# EAGLE board OpenBook Schematic v49 (EAGLE 9.7.0)
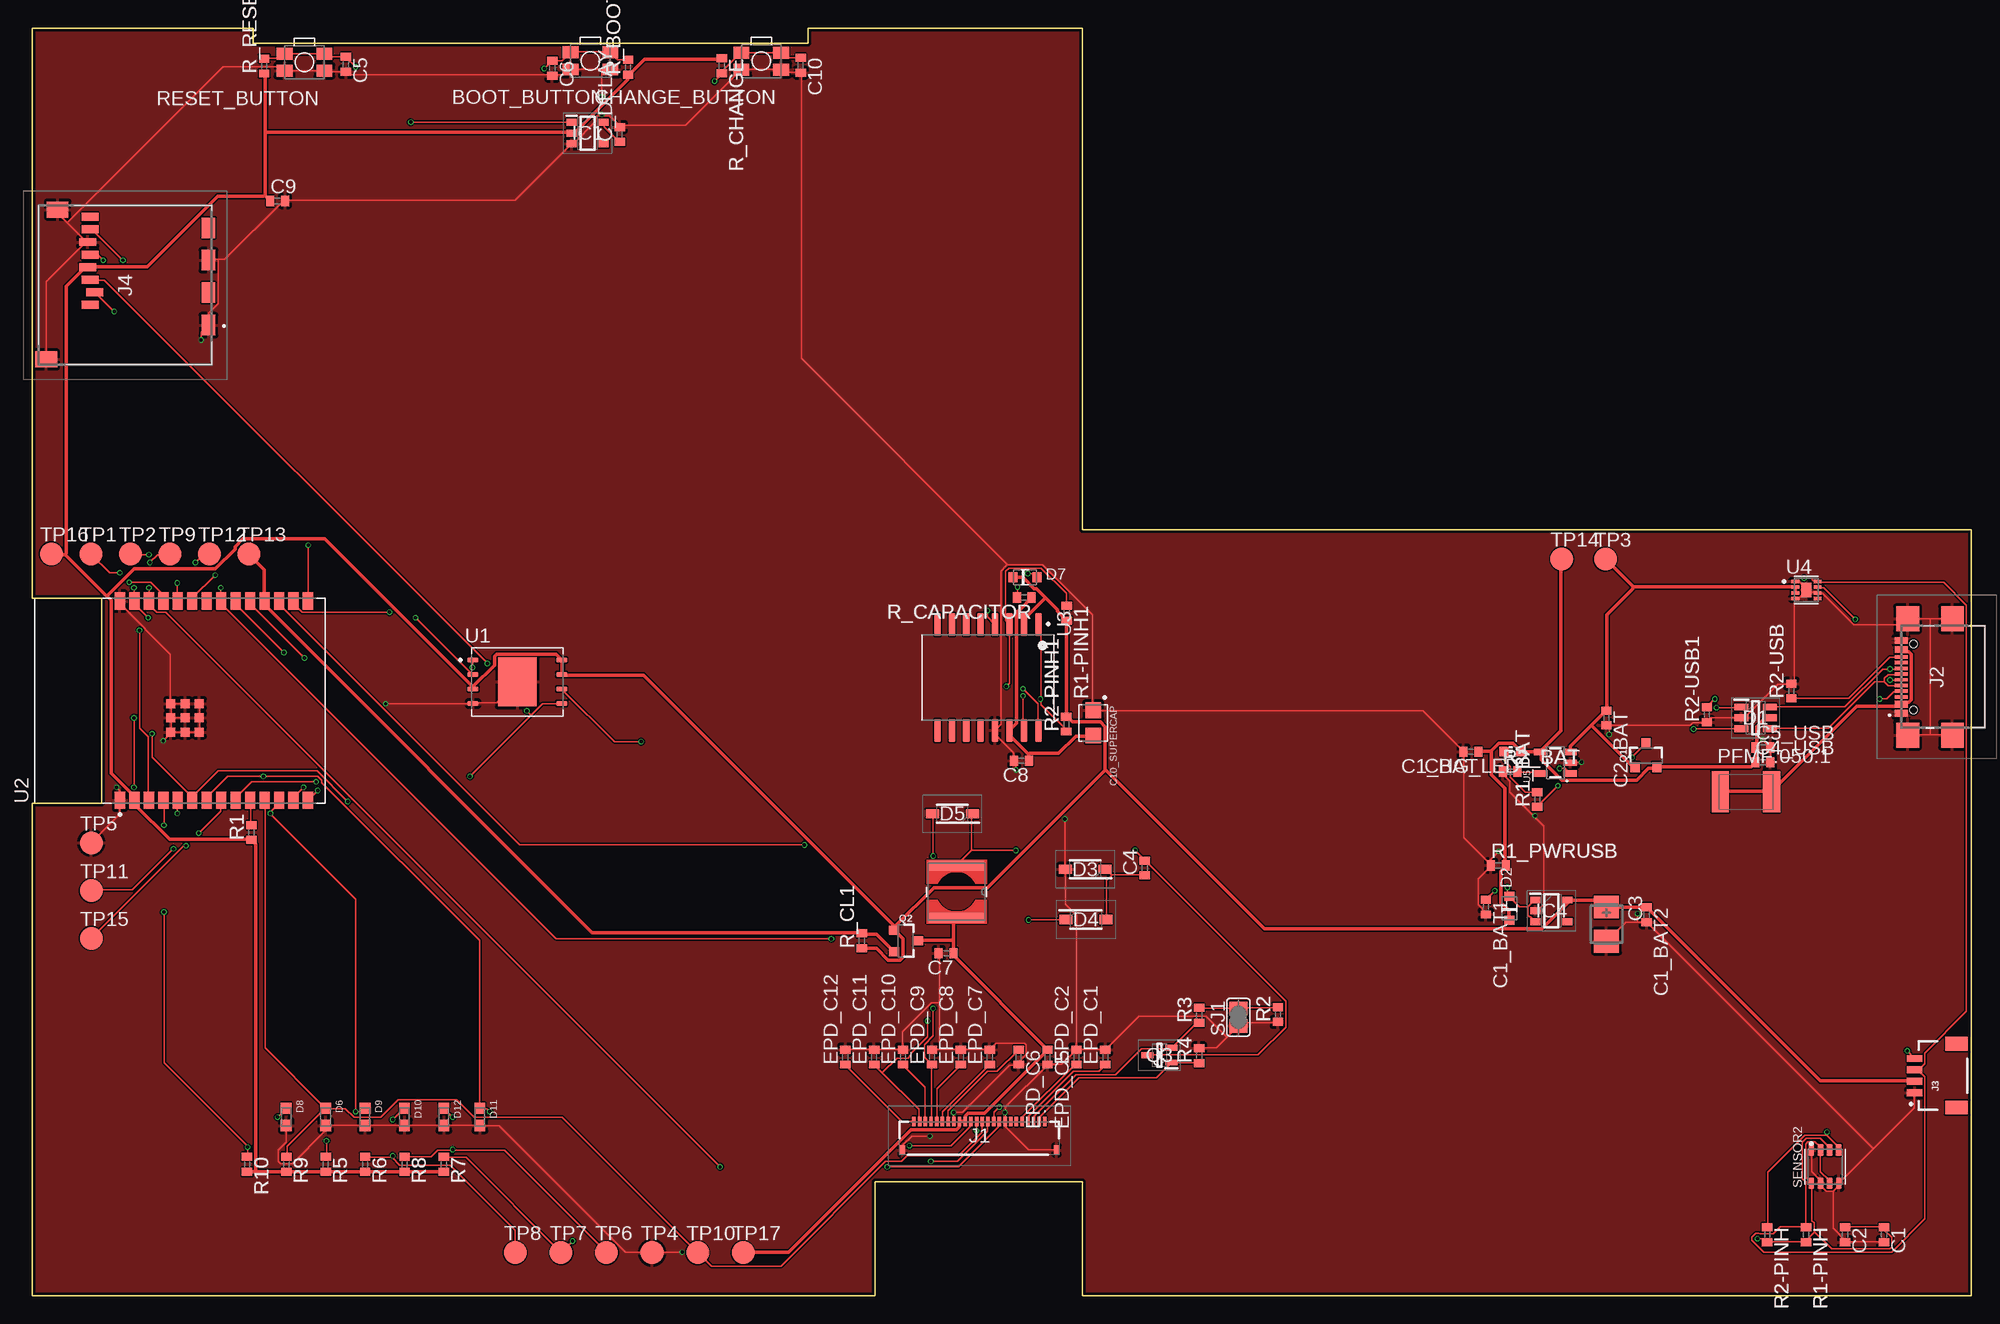
[diagram p0: board, top side]
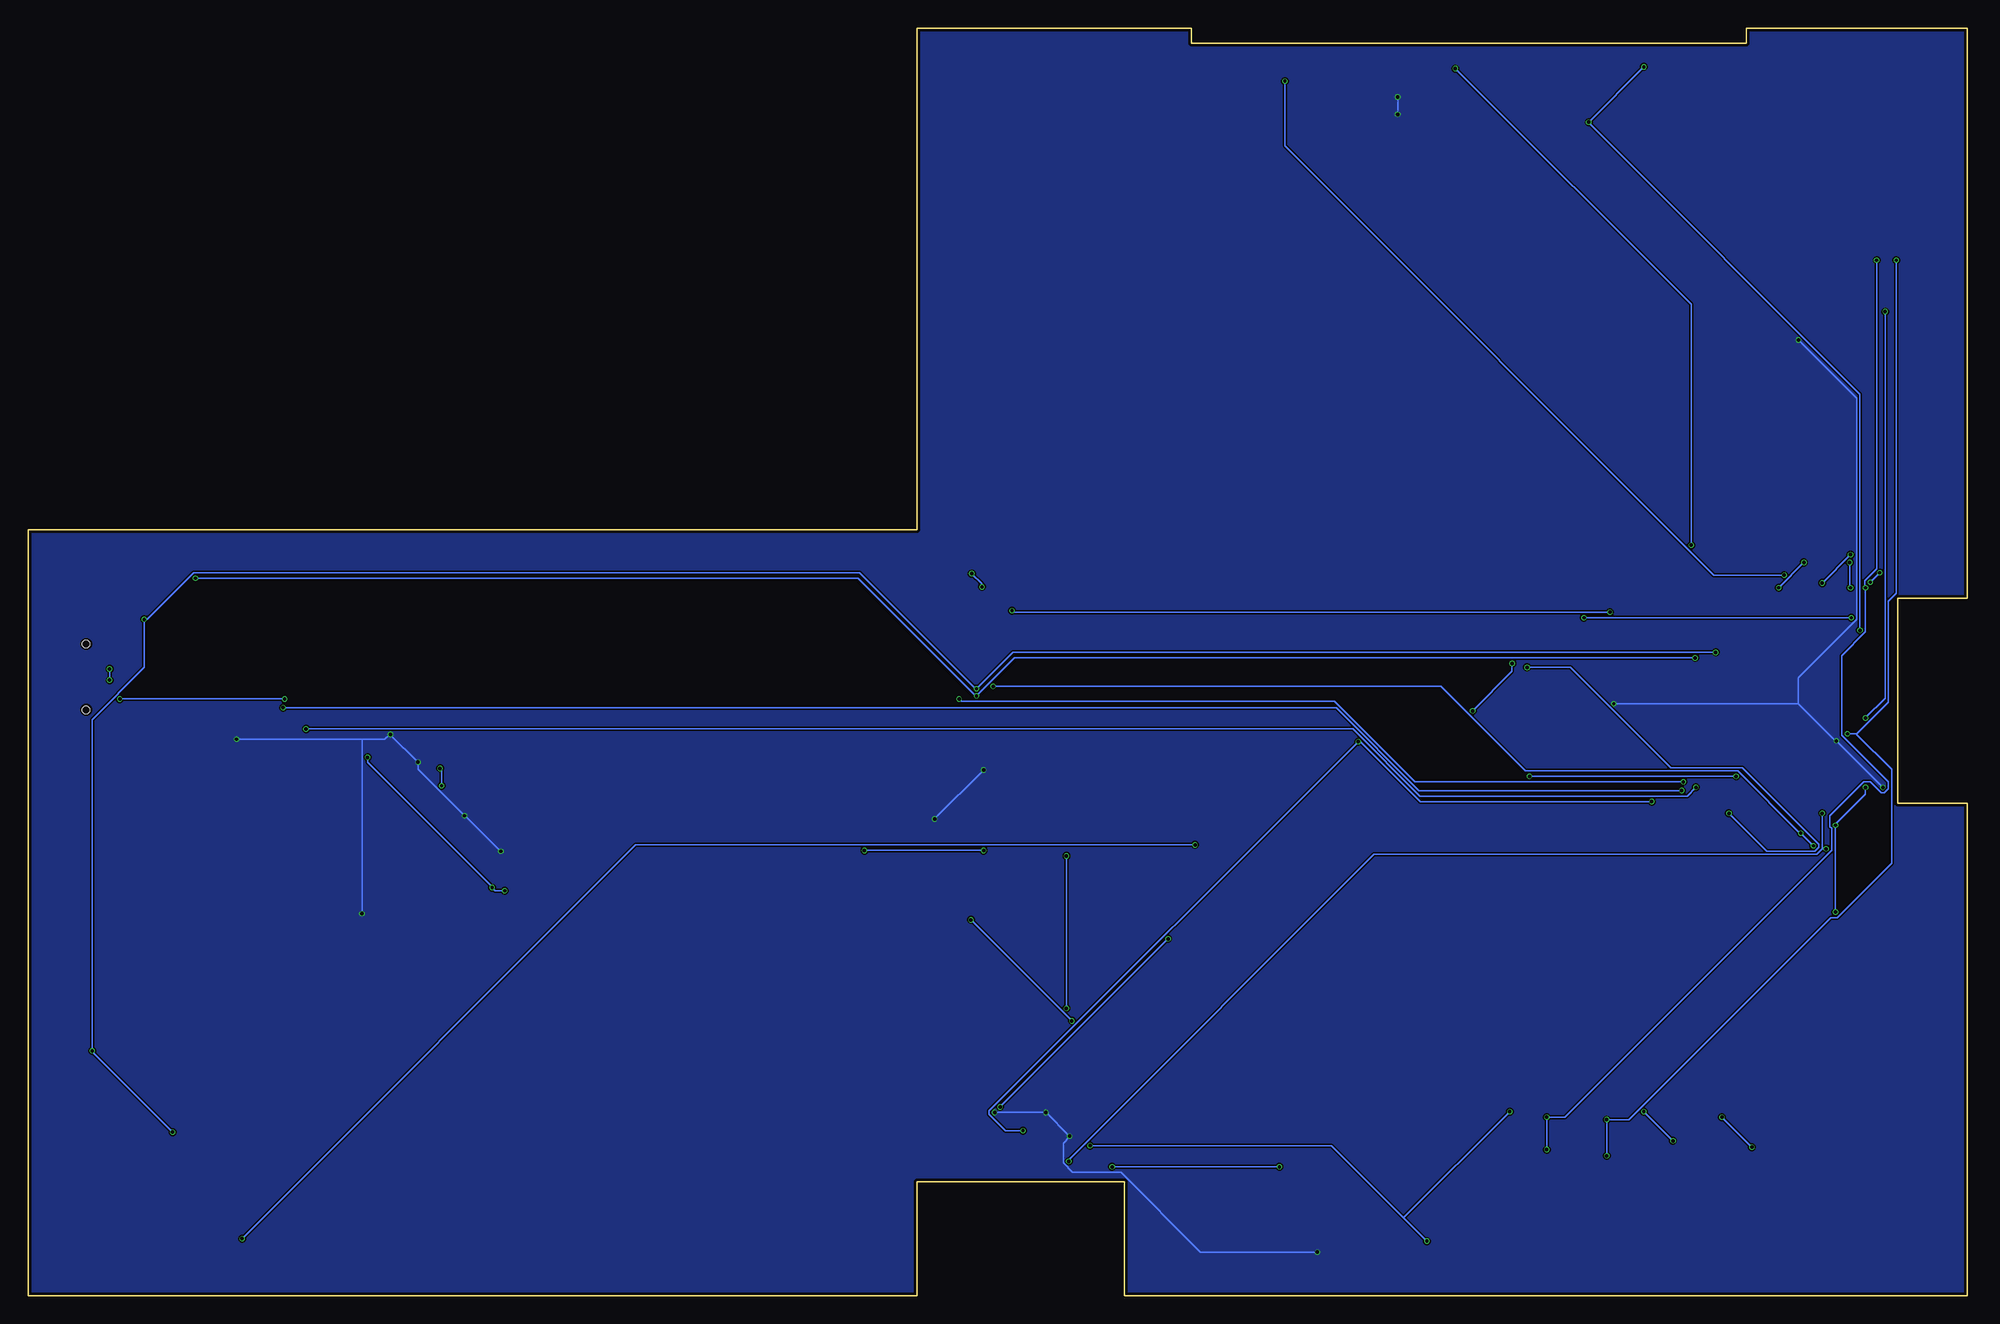
[diagram p1: board, bottom side, seen from below]

Size 170.2 x 111.2 mm. Coordinates in mm from the lower left corner, seen from the top.
Outline: 0,0 74,0 74,10 92.2,10 92.2,0 170.2,0 170.2,67.2 92.2,67.2 92.2,111.2 68.1,111.2 68.1,109.9 19.4,109.9 19.4,111.2 0,111.2 0,61.2 6.1,61.2 6.1,43.2 0,43.2 0,0
Copper layers (1*16): Top 0.035mm / dielectric 1.6mm / Bottom 0.035mm
Design rules "jlcpcb-2layers.dru": minimum track width 0.15mm, minimum drill 0.3mm, track to track 5mil, track to pad 5mil, pad to pad 5mil, via to via 5mil, smd to smd 5mil, copper to edge 0.2mm, drill to drill 6mil, minimum pad ring 10mil, minimum via ring 3mil, stop-mask expansion 4mil, vias tented up to drill 0mil, thermal gap 10mil
Net classes: 1 Power: width 0.3 mm

## Footprints (pad centres in the part's own frame; a part is rotated, then mirrored left to right if it is on the bottom)
MYBUTTON = smd 1.4 x 1.05: 1 1.75,0.75; 2 -1.75,0.75; 3 -1.75,-0.75; 4 1.75,-0.75
EAGLE-LTSPICE_C0402 = smd 0.7 x 0.9: 1 -0.65,0; 2 0.65,0
RCL_CT3528 = smd 2 x 2.2: + -1.5,0; - 1.5,0
CAPCP3225X100N = smd 1.4 x 1.4: 1 -1.1,0; 2 1.1,0
ADAFRUIT_CHIP-LED0603 = smd 0.8 x 0.8: A 0,-0.75; C 0,0.75
SOT95P280X145-6N = smd 1.2 x 0.6: 1 -1.25,0.95; 2 -1.25,0; 3 -1.25,-0.95; 4 1.25,-0.95; 5 1.25,0; 6 1.25,0.95
ESP32_WROVER_AVX---SD0805S020S1R0_AVX_SD0805S020S1R0_0 = smd 0.8 x 0.9: 1 -1.05,0; 2 1.05,0
SOD3716X135N = smd 1.15 x 0.8: 1 -1.75,0; 2 1.75,0
DIOC1608X36N = smd 0.97 x 0.94: 1 -0.75,0; 2 0.75,0
SOT95P280X125-5N = smd 0.9 x 0.6: 1 -1.4,0.95; 2 -1.4,0; 3 -1.4,-0.95; 4 1.4,-0.95; 5 1.4,0.95
SOT95P280X120-5N = smd 0.9 x 0.6: 1 -1.4,0.95; 2 -1.4,0; 3 -1.4,-0.95; 4 1.4,-0.95; 5 1.4,0.95
FH34SRJ24S05SH99 = smd 0.3 x 0.8: 1 5.75,1.45; 2 5.25,1.45; 3 4.75,1.45; 4 4.25,1.45; 5 3.75,1.45; 6 3.25,1.45; 7 2.75,1.45; 8 2.25,1.45; 9 1.75,1.45; 10 1.25,1.45; 11 0.75,1.45; 12 0.25,1.45; 13 -0.25,1.45; 14 -0.75,1.45; 15 -1.25,1.45; 16 -1.75,1.45; 17 -2.25,1.45; 18 -2.75,1.45; 19 -3.25,1.45; 20 -3.75,1.45; 21 -4.25,1.45; 22 -4.75,1.45; 23 -5.25,1.45; 24 -5.75,1.45 | smd 0.4 x 0.8: MP1 6.75,-1.05; MP2 -6.75,-1.05
SAMACSYS_PARTS_USB4110GFA = smd 0.3 x 1.15: A1 -3.35,3.678; A4 -2.55,3.678; A5 -1.25,3.678; A6 -0.25,3.678; A7 0.25,3.678; A8 1.25,3.678; A9 2.55,3.678; A12 3.35,3.678; B1 3.05,3.678; B4 2.25,3.678; B5 1.75,3.678; B6 0.75,3.678; B7 -0.75,3.678; B8 -1.75,3.678; B9 -2.25,3.678; B12 -3.05,3.678 | smd 2.18 x 2: MP1 -5.11,-0.827; MP2 5.11,-0.827; MP3 -5.11,3.103; MP4 5.11,3.103 | hole 0.65: -2.89,2.603; 2.89,2.603
JST04_1MM_RA = smd 0.6 x 1.35: 1 -1.5,0; 2 -0.5,0; 3 0.5,0; 4 1.5,0 | smd 1.2 x 2: NC1 2.8,-3.675; NC2 -2.8,-3.675
112ATAARR03ATTEND = smd 1.8 x 1.2: G1 10.6,10.4; G2 4.9,10.4; S1 7.75,10.4; S2 2.05,10.4 | smd 1.4 x 1.9: G3 13.6,-3.85; G4 0.45,-2.85 | smd 0.7 x 1.5: P1 8.8,0; P2 7.7,0.4; P3 6.6,0; P4 5.5,-0.2; P5 4.4,0; P6 3.3,-0.2; P7 2.2,0; P8 1.1,0
IND_4828-WE-TPC_WRE = smd 0.889 x 4.826: 1 -2.286,0; 2 2.286,0
ESP32C6_VARISTOR_CT/CN1812 = smd 1.5 x 3.6: 1 -2.25,0; 2 2.25,0
ESP32_WROVER_SPARKFUN-DISCRETESEMI_SOT23-3 = smd 0.8 x 0.9: 1 -0.95,-1; 2 0.95,-1; 3 0,1.1
SOT65P210X110-3N = smd 1.05 x 0.5: 1 -1.05,0.65; 2 -1.05,-0.65; 3 1.05,0
ESP32_WROVER_EAGLE-LTSPICE_R0402 = smd 0.7 x 0.9: 1 -0.65,0; 2 0.65,0
ESP32_WROVER_BME680_PSON80P300X300X100-8N = smd 1.016 x 0.5: 1 1.458,1.2; 2 1.458,0.4; 3 1.458,-0.4; 4 1.458,-1.2; 5 -1.458,-1.22; 6 -1.458,-0.4; 7 -1.458,0.4; 8 -1.458,1.2
SJ = smd 1.168 x 1.6: 1 -0.762,0; 2 0.762,0
TP20R = smd 2 x 2: TP 0,0
SON127P600X800X80-9N = smd 0.94 x 0.44: 1 -3.895,1.905; 2 -3.895,0.635; 3 -3.895,-0.635; 4 -3.895,-1.905; 5 3.895,-1.905; 6 3.895,-0.635; 7 3.895,0.635; 8 3.895,1.905 | smd 3.4 x 4.3: 9 0,0
XCVR_ESP32-C6-WROOM-1-N8 = smd 1.5 x 0.9: 1 -8.75,5.26; 2 -8.75,3.99; 3 -8.75,2.72; 4 -8.75,1.45; 5 -8.75,0.18; 6 -8.75,-1.09; 7 -8.75,-2.36; 8 -8.75,-3.63; 9 -8.75,-4.9; 10 -8.75,-6.17; 11 -8.75,-7.44; 12 -8.75,-8.71; 13 -8.75,-9.98; 14 -8.75,-11.25; 15 8.75,-11.25; 16 8.75,-9.98; 17 8.75,-8.71; 18 8.75,-7.44; 19 8.75,-6.17; 20 8.75,-4.9; 21 8.75,-3.63; 22 8.75,-2.36; 23 8.75,-1.09; 24 8.75,0.18; 25 8.75,1.45; 26 8.75,2.72; 27 8.75,3.99; 28 8.75,5.26 | smd 0.8 x 0.8: 29_1 -2.755,0.79; 29_2 -1.505,0.79; 29_3 -0.255,0.79; 29_4 -2.755,-0.46; 29_5 -1.505,-0.46; 29_6 -0.255,-0.46; 29_7 -2.755,-1.71; 29_8 -1.505,-1.71; 29_9 -0.255,-1.71
SOIC127P1032X265-16N = smd 2.05 x 0.59: 1 -4.655,4.445; 2 -4.655,3.175; 3 -4.655,1.905; 4 -4.655,0.635; 5 -4.655,-0.635; 6 -4.655,-1.905; 7 -4.655,-3.175; 8 -4.655,-4.445; 9 4.655,-4.445; 10 4.655,-3.175; 11 4.655,-1.905; 12 4.655,-0.635; 13 4.655,0.635; 14 4.655,1.905; 15 4.655,3.175; 16 4.655,4.445
SON50P200X200X80-9N = smd 0.76 x 0.3: 1 -0.985,0.75; 2 -0.985,0.25; 3 -0.985,-0.25; 4 -0.985,-0.75; 5 0.985,-0.75; 6 0.985,-0.25; 7 0.985,0.25; 8 0.985,0.75 | smd 0.9 x 1.3: 9 0,0
ESP32_WROVER_SPARKFUN-IC-POWER_SOT23-5 = smd 0.55 x 1.2: 1 -0.95,-1.3; 2 0,-1.3; 3 0.95,-1.3; 4 0.95,1.3; 5 -0.95,1.3

## Placement (x,y rotation side)
BOOT_BUTTON  BUTTON_CUSYOMV11  [MYBUTTON]  49,108.35 180 top
C1  100nF  [EAGLE-LTSPICE_C0402]  162.56,5.34 270 top
C1_BAT  4.7uF  [EAGLE-LTSPICE_C0402]  126.29,47.72 180 top
C1_BAT1  4.7uF  [EAGLE-LTSPICE_C0402]  127.62,34.09 270 top
C1_BAT2  4.7uF  [EAGLE-LTSPICE_C0402]  141.72,33.41 270 top
C2  100nF  [EAGLE-LTSPICE_C0402]  159.14,5.34 270 top
C2_BAT  4.7uF  [EAGLE-LTSPICE_C0402]  138.18,50.68 270 top
C3  100uF TANT  [RCL_CT3528]  138.2,32.59 270 top
C4  4.7uF/25V  [EAGLE-LTSPICE_C0402]  97.66,37.52 90 top
C4_USB  100nF  [EAGLE-LTSPICE_C0402]  151.92,46.8 0 top
C5  1uF  [EAGLE-LTSPICE_C0402]  27.54,108.05 270 top
C5_USB  4.7uF  [EAGLE-LTSPICE_C0402]  151.93,48.1 0 top
C6  100nF  [EAGLE-LTSPICE_C0402]  45.66,107.72 270 top
C7  10uF  [EAGLE-LTSPICE_C0402]  80.23,30.04 180 top
C8  100nF  [EAGLE-LTSPICE_C0402]  86.84,46.94 180 top
C9  100nF  [EAGLE-LTSPICE_C0402]  21.54,96.06 0 top
C10  100nF  [EAGLE-LTSPICE_C0402]  67.46,107.98 270 top
C10_SUPERCAP  CPH3225A  [CAPCP3225X100N]  93.14,50.25 270 top
C_DELAY  100nF  [EAGLE-LTSPICE_C0402]  51.58,101.89 90 top
CHANGE_BUTTON  BUTTON_CUSYOMV11  [MYBUTTON]  64,108.34 180 top
CHG_LED  [ADAFRUIT_CHIP-LED0603]  129.95,47.74 90 top
D1  USBLC6-2SC6Y  [SOT95P280X145-6N]  151.28,50.7 0 top
D2  SD0805S020S1R0  [ESP32_WROVER_AVX---SD0805S020S1R0_AVX_SD0805S020S1R0_0]  129.68,33.99 90 top
D3  MBR05301  [SOD3716X135N]  92.44,37.4 180 top
D4  MBR05301  [SOD3716X135N]  92.5,33 0 top
D5  MBR05301  [SOD3716X135N]  80.78,42.29 180 top
D6  PGB1010603MR1  [DIOC1608X36N]  25.76,15.67 270 top
D7  SD0805S020S1R0  [ESP32_WROVER_AVX---SD0805S020S1R0_AVX_SD0805S020S1R0_0]  87.16,63.03 0 top
D8  PGB1010603MR1  [DIOC1608X36N]  22.3,15.67 270 top
D9  PGB1010603MR1  [DIOC1608X36N]  29.22,15.67 270 top
D10  PGB1010603MR1  [DIOC1608X36N]  32.68,15.67 270 top
D11  PGB1010603MR1  [DIOC1608X36N]  39.3,15.67 270 top
D12  PGB1010603MR1  [DIOC1608X36N]  36.14,15.67 270 top
EPD_C1  1uF/50V  [EAGLE-LTSPICE_C0402]  94.2,20.93 90 top
EPD_C2  1uF/50V  [EAGLE-LTSPICE_C0402]  91.66,20.93 90 top
EPD_C5  0.1uF/50V  [EAGLE-LTSPICE_C0402]  89.13,20.93 270 top
EPD_C6  1uF/50V  [EAGLE-LTSPICE_C0402]  86.59,20.93 270 top
EPD_C7  1uF/50V  [EAGLE-LTSPICE_C0402]  84.06,20.93 90 top
EPD_C8  1uF/50V  [EAGLE-LTSPICE_C0402]  81.52,20.93 90 top
EPD_C9  1uF/50V  [EAGLE-LTSPICE_C0402]  78.99,20.93 90 top
EPD_C10  1uF/50V  [EAGLE-LTSPICE_C0402]  76.45,20.93 90 top
EPD_C11  1uF/50V  [EAGLE-LTSPICE_C0402]  73.92,20.93 90 top
EPD_C12  1uF/50V  [EAGLE-LTSPICE_C0402]  71.38,20.93 90 top
IC1  BD5229G-TR  [SOT95P280X125-5N]  48.75,102.02 0 top
IC4  XC6220A331MR-G  [SOT95P280X120-5N]  133.36,33.76 0 top
J1  FH34SRJ-24S-0.5SH_99_  [FH34SRJ24S05SH99]  83.15,13.82 0 top
J2  SAMACSYS_PARTS_USB4110-GF-A  [SAMACSYS_PARTS_USB4110GFA]  167.74,54.29 90 top
J3  QWIIC_RIGHT_ANGLE  [JST04_1MM_RA]  165.25,19.3 90 top
J4  112A-TAAR-R03_ATTEND  [112ATAARR03ATTEND]  5.08,95.76 270 top
L1  68uH  [IND_4828-WE-TPC_WRE]  81.15,35.43 270 top
PFMF.050.1  ESP32C6_VARISTORCN1812  [ESP32C6_VARISTOR_CT/CN1812]  150.44,44.2 0 top
Q1  20V/4.2A/52mΩ/1.4W  [ESP32_WROVER_SPARKFUN-DISCRETESEMI_SOT23-3]  141.66,47.36 0 top
Q2  20V/4.2A/52mΩ/1.4W  [ESP32_WROVER_SPARKFUN-DISCRETESEMI_SOT23-3]  76.66,31.12 270 top
Q3  SI1308EDL-T1-GE3  [SOT65P210X110-3N]  98.95,21.09 180 top
R1  10K  [ESP32_WROVER_EAGLE-LTSPICE_R0402]  19.24,40.63 90 top
R1-PINH  10K  [ESP32_WROVER_EAGLE-LTSPICE_R0402]  155.72,5.34 270 top
R1-PINH1  10K  [ESP32_WROVER_EAGLE-LTSPICE_R0402]  90.82,59.89 270 top
R1_BAT  200  [ESP32_WROVER_EAGLE-LTSPICE_R0402]  132.12,43.53 90 top
R1_PWRUSB  100K  [ESP32_WROVER_EAGLE-LTSPICE_R0402]  128.71,37.74 0 top
R2  2.2  [ESP32_WROVER_EAGLE-LTSPICE_R0402]  109.36,24.67 90 top
R2-PINH  10K  [ESP32_WROVER_EAGLE-LTSPICE_R0402]  152.3,5.34 270 top
R2-PINH1  10K  [ESP32_WROVER_EAGLE-LTSPICE_R0402]  90.78,50.15 90 top
R2-USB  5k1  [ESP32_WROVER_EAGLE-LTSPICE_R0402]  154.42,53.05 90 top
R2-USB1  5k1  [ESP32_WROVER_EAGLE-LTSPICE_R0402]  147,50.98 90 top
R2_BAT  2K  [ESP32_WROVER_EAGLE-LTSPICE_R0402]  129.74,45.98 0 top
R3  0.47  [ESP32_WROVER_EAGLE-LTSPICE_R0402]  102.44,24.59 90 top
R4  10K  [ESP32_WROVER_EAGLE-LTSPICE_R0402]  102.44,21.05 90 top
R5  10K  [ESP32_WROVER_EAGLE-LTSPICE_R0402]  25.77,11.51 270 top
R6  10K  [ESP32_WROVER_EAGLE-LTSPICE_R0402]  29.23,11.51 270 top
R7  10K  [ESP32_WROVER_EAGLE-LTSPICE_R0402]  36.14,11.51 270 top
R8  10K  [ESP32_WROVER_EAGLE-LTSPICE_R0402]  32.68,11.51 270 top
R9  10K  [ESP32_WROVER_EAGLE-LTSPICE_R0402]  22.32,11.51 270 top
R10  10K  [ESP32_WROVER_EAGLE-LTSPICE_R0402]  18.86,11.51 270 top
R_BOOT  10K  [ESP32_WROVER_EAGLE-LTSPICE_R0402]  52.3,107.79 90 top
R_CAPACITOR  15  [ESP32_WROVER_EAGLE-LTSPICE_R0402]  87.09,61.26 180 top
R_CHANGE  10K  [ESP32_WROVER_EAGLE-LTSPICE_R0402]  60.54,107.92 270 top
R_CL1  10K  [ESP32_WROVER_EAGLE-LTSPICE_R0402]  72.82,31.13 90 top
R_RESET  10K  [ESP32_WROVER_EAGLE-LTSPICE_R0402]  20.36,107.9 90 top
RESET_BUTTON  BUTTON_CUSYOMV11  [MYBUTTON]  23.9,108.24 180 top
SENSOR2  BME688  [ESP32_WROVER_BME680_PSON80P300X300X100-8N]  157.38,11.31 90 top
SJ1  [SJ]  105.88,24.42 90 top
TP1  TPTP20R  [TP20R]  5.14,65.09 0 top
TP2  TPTP20R  [TP20R]  8.61,65.09 0 top
TP3  TPTP20R  [TP20R]  138.11,64.62 0 top
TP4  TPTP20R  [TP20R]  54.42,3.77 0 top
TP5  TPTP20R  [TP20R]  5.18,39.72 0 top
TP6  TPTP20R  [TP20R]  50.41,3.77 0 top
TP7  TPTP20R  [TP20R]  46.41,3.77 0 top
TP8  TPTP20R  [TP20R]  42.41,3.77 0 top
TP9  TPTP20R  [TP20R]  12.08,65.09 0 top
TP10  TPTP20R  [TP20R]  58.42,3.77 0 top
TP11  TPTP20R  [TP20R]  5.18,35.53 0 top
TP12  TPTP20R  [TP20R]  15.55,65.09 0 top
TP13  TPTP20R  [TP20R]  19.02,65.09 0 top
TP14  TPTP20R  [TP20R]  134.27,64.64 0 top
TP15  TPTP20R  [TP20R]  5.18,31.34 0 top
TP16  TPTP20R  [TP20R]  1.67,65.09 0 top
TP17  TPTP20R  [TP20R]  62.42,3.77 0 top
U1  W25Q512JVEIQ  [SON127P600X800X80-9N]  42.59,53.86 0 top
U2  ESP32-C6-WROOM-1-N8  [XCVR_ESP32-C6-WROOM-1-N8]  12.96,52.2 90 top
U3  DS3231SN#  [SOIC127P1032X265-16N]  83.9,54.25 270 top
U4  MAX17048G+T10  [SON50P200X200X80-9N]  155.75,61.92 0 top
U5  MCP73831  [ESP32_WROVER_SPARKFUN-IC-POWER_SOT23-5]  133.71,46.76 90 top

## Library data of the parts
BOOT_BUTTON C1 C1_BAT C1_BAT1 C1_BAT2 C2 C2_BAT C4 C4_USB C5 C5_USB C6-C10 C_DELAY CHANGE_BUTTON CHG_LED D3-D12 EPD_C1 EPD_C2 EPD_C5-EPD_C12 PFMF.050.1 Q1 R1 R1-PINH R1-PINH1 R1_BAT R1_PWRUSB R2 R2-PINH R2-PINH1 R2-USB1 R2_BAT R3-R10 R_BOOT R_CAPACITOR R_CHANGE R_CL1 R_RESET RESET_BUTTON SJ1 TP1-TP17 = DeskAssistant v19 v1
C3 = DeskAssistant v19 v1; SPICEPREFIX: C
C10_SUPERCAP = DeskAssistant v19 v1; AVAILABILITY: Not in stock; CHECK_PRICES: https://www.snapeda.com/parts/CPH3225A/Seiko+Instruments/view-part/?ref=eda; DESCRIPTION: 11 mF (EDLC) Supercapacitor 3.3 V 1210 (3225 Metric) - -; MF: Seiko Instruments; MP: CPH3225A; PACKAGE: 1210 Seiko; PRICE: None; PURCHASE-URL: https://www.snapeda.com/api/url_track_click_mouser/?unipart_id=562593&manufacturer=Seiko Instruments&part_name=CPH3225A&search_term=None; SNAPEDA_LINK: https://www.snapeda.com/parts/CPH3225A/Seiko+Instruments/view-part/?ref=snap
D1 = DeskAssistant v19 v1; AVAILABILITY: In Stock; CHECK_PRICES: https://www.snapeda.com/parts/USBLC6-2SC6Y/STMicroelectronics/view-part/?ref=eda; DESCRIPTION: 17V Clamp 5A (8/20µs) Ipp Tvs Diode Surface Mount SOT-23-6; MF: STMicroelectronics; MP: USBLC6-2SC6Y; PACKAGE: SOT-23-6 STMicroelectronics; PRICE: None; SNAPEDA_LINK: https://www.snapeda.com/parts/USBLC6-2SC6Y/STMicroelectronics/view-part/?ref=snap
D2 = DeskAssistant v19 v1; MINE: SD0805S020S1R0
IC1 = DeskAssistant v19 v1; DESCRIPTION: Voltage Detector with Adjustable Delay Time: CMOS processes are utilized to develop high precision, low current consumption CMOS reset ICs that allow arbitrary setting of the delay time. The extensive lineup includes both Nch Open Drain and CMOS output types in a wide range of detection voltages (from 2.3V to 6.0V, in 0.1V steps), enabling selection of the ideal solution based on customer requirements. In addition, the entire series is of course both lead-free and RoHS-compliant.; HEIGHT: 1.25mm; MANUFACTURER_NAME: ROHM Semiconductor; MANUFACTURER_PART_NUMBER: BD5229G-TR; MOUSER_PART_NUMBER: 755-BD5229G-TR; MOUSER_PRICE-STOCK: https://www.mouser.co.uk/ProductDetail/ROHM-Semiconductor/BD5229G-TR?qs=4kLU8WoGk0vvnhrrYwdszw%3D%3D
IC4 = DeskAssistant v19 v1; DESCRIPTION: LDO Voltage Regulators; HEIGHT: 1.2mm; MANUFACTURER_NAME: Torex; MANUFACTURER_PART_NUMBER: XC6220A331MR-G; MOUSER_PART_NUMBER: 865-XC6220A331MR-G; MOUSER_PRICE-STOCK: https://www.mouser.co.uk/ProductDetail/Torex-Semiconductor/XC6220A331MR-G?qs=AsjdqWjXhJ8ZSWznL1J0gg%3D%3D
J1 = DeskAssistant v19 v1; DESCRIPTION: 24 Position FFC, FPC Connector Contacts, Top and Bottom 0.020" (0.50mm) Surface Mount, Right Angle; HEIGHT: 1.1mm; MANUFACTURER_NAME: Hirose; MANUFACTURER_PART_NUMBER: FH34SRJ-24S-0.5SH(99); MOUSER_PART_NUMBER: 798-FH34SRJ24S05SH99; MOUSER_PRICE-STOCK: https://www.mouser.co.uk/ProductDetail/Hirose-Connector/FH34SRJ-24S-0.5SH99?qs=vcbW%252B4%252BSTIpKBl5ap9J8Fw%3D%3D
J2 = DeskAssistant v19 v1; DESCRIPTION: CONN USB 2.0 TYPE-C R/A SMT; HEIGHT: 3.26mm; MANUFACTURER_NAME: GCT (GLOBAL CONNECTOR TECHNOLOGY); MANUFACTURER_PART_NUMBER: USB4110-GF-A; MOUSER_PART_NUMBER: 640-USB4110-GF-A; MOUSER_PRICE-STOCK: https://www.mouser.co.uk/ProductDetail/GCT/USB4110-GF-A?qs=KUoIvG%2F9IlYiZvIXQjyJeA%3D%3D
J3 = DeskAssistant v19 v1; PROD_ID: CONN-13694
J4 = DeskAssistant v19 v1; DESCRIPTION: Micro SD Card Socket, Push-Push Type, Top Mount, SMT, H=1.83mm, 10u; HEIGHT: 1.9mm; MANUFACTURER_NAME: ATTEND; MANUFACTURER_PART_NUMBER: 112A-TAAR-R03 ATTEND
L1 = DeskAssistant v19 v1; COPYRIGHT: Copyright (C) 2024 Ultra Librarian. All rights reserved.; MANUFACTURER_PART_NUMBER: 744043680; MFR_NAME: Wurth Electronics
Q2 = DeskAssistant v19 v1; MINE: DMG2305UX-7
Q3 = DeskAssistant v19 v1; AVAILABILITY: In Stock; CHECK_PRICES: https://www.snapeda.com/parts/SI1308EDL-T1-GE3/Vishay+Siliconix/view-part/?ref=eda; DESCRIPTION: Si1308EDL-T1-GE3 N-channel MOSFET Transistor, 1.5 A, 30 V, 3-Pin SC-70 | Siliconix / Vishay SI1308EDL-T1-GE3; MF: Vishay Siliconix; MP: SI1308EDL-T1-GE3; PACKAGE: SOT-323 Vishay Semiconductor; PRICE: None; PURCHASE-URL: https://www.snapeda.com/api/url_track_click_mouser/?unipart_id=274603&manufacturer=Vishay Siliconix&part_name=SI1308EDL-T1-GE3&search_term=None; SNAPEDA_LINK: https://www.snapeda.com/parts/SI1308EDL-T1-GE3/Vishay+Siliconix/view-part/?ref=snap
R2-USB = DeskAssistant v19 v1; R2-USB: 5k1
SENSOR2 = DeskAssistant v19 v1; AVAILABILITY: Unavailable; DESCRIPTION: Integrated Environmental Unit; MF: Bosch Sensortec; MP: BME680; PACKAGE: LGA-8 Bosch Tools; PRICE: None
U1 = DeskAssistant v19 v1; AVAILABILITY: In Stock; CHECK_PRICES: https://www.snapeda.com/parts/W25Q512JVEIQ/Winbond+Electronics/view-part/?ref=eda; DESCRIPTION: FLASH - NOR Memory IC 512Mb (64M x 8) SPI - Quad I/O 133 MHz 8-WSON (8x6); MF: Winbond Electronics; MP: W25Q512JVEIQ; PACKAGE: Package; PRICE: None; SNAPEDA_LINK: https://www.snapeda.com/parts/W25Q512JVEIQ/Winbond+Electronics/view-part/?ref=snap
U2 = DeskAssistant v19 v1; AVAILABILITY: In Stock; CHECK_PRICES: https://www.snapeda.com/parts/ESP32-C6-WROOM-1-N8/Espressif+Systems/view-part/?ref=eda; DESCRIPTION: Multiprotocol Modules ESP32-C6 module, Wi-Fi 6 in 2.4 GHz band, Bluetooth 5, Zigbee 3.0 and Thread. ESP34-WROOM Compatible - ENGINEERING SAMPLE; MF: Espressif Systems; MP: ESP32-C6-WROOM-1-N8; PACKAGE: None; PRICE: None; SNAPEDA_LINK: https://www.snapeda.com/parts/ESP32-C6-WROOM-1-N8/Espressif+Systems/view-part/?ref=snap
U3 = DeskAssistant v19 v1; AVAILABILITY: In Stock; CHECK_PRICES: https://www.snapeda.com/parts/DS3231SN%23/Analog+Devices/view-part/?ref=eda; DESCRIPTION: Extremely Accurate I²C-Integrated RTC/TCXO/Crystal; MF: Analog Devices; MP: DS3231SN#; PACKAGE: SOIC-16 Maxim; PRICE: None; PURCHASE-URL: https://www.snapeda.com/api/url_track_click_mouser/?unipart_id=99048&manufacturer=Analog Devices&part_name=DS3231SN#&search_term=None; SNAPEDA_LINK: https://www.snapeda.com/parts/DS3231SN%23/Analog+Devices/view-part/?ref=snap
U4 = DeskAssistant v19 v1; AVAILABILITY: In Stock; CHECK_PRICES: https://www.snapeda.com/parts/MAX17048G+T10/Analog+Devices/view-part/?ref=eda; DESCRIPTION: 3µA 1-Cell/2-Cell Fuel Gauge with ModelGauge; MF: Analog Devices; MP: MAX17048G+T10; PACKAGE: TDFN-8 Maxim; PRICE: None; PURCHASE-URL: https://www.snapeda.com/api/url_track_click_mouser/?unipart_id=329239&manufacturer=Analog Devices&part_name=MAX17048G+T10&search_term=None; SNAPEDA_LINK: https://www.snapeda.com/parts/MAX17048G+T10/Analog+Devices/view-part/?ref=snap
U5 = DeskAssistant v19 v1; PROD_ID: IC-09995

## Nets
3V3 [Power]: C1_BAT2.1 C3.+ C9.1 D7.1 IC1.2 IC4.5 J3.2 J4.P4 Q2.1 R1-PINH1.2 R1.1 R2-PINH1.2 R5.2 R6.2 R7.2 R8.2 R9.2 R10.2 R_BOOT.1 R_CHANGE.1 R_CL1.1 R_RESET.1 TP16.TP U1.3 U1.7 U1.8 U2.2 U3.2
32KHZ: R2-PINH1.1 U2.9 U3.1
DN: D1.4 J2.A7 J2.B7
DP: D1.6 J2.A6 J2.B6
EPD_3V3 [Power]: C7.1 EPD_C5.1 J1.15 J1.16 L1.2 Q2.3 TP17.TP
EPD_3V3_C [Power]: Q2.2 R_CL1.2 TP13.TP U2.18
EPD_BUSY: J1.9 TP9.TP U2.26
EPD_CS: D6.1 J1.12 R9.1 TP10.TP U2.11
EPD_DC: J1.11 TP11.TP U2.5
EPD_RST: J1.10 TP12.TP U2.21
FLASH_CS: D9.1 R5.1 U1.1 U2.12
GDR: J1.2 Q3.1 R4.1
GND: BOOT_BUTTON.1 BOOT_BUTTON.2 C1.2 C1_BAT1.2 C1_BAT2.2 C1_BAT.2 C2.2 C2_BAT.2 C3.- C4_USB.2 C5.2 C5_USB.2 C6.2 C7.2 C8.2 C9.2 C10.2 C10_SUPERCAP.1 C_DELAY.2 CHANGE_BUTTON.1 CHANGE_BUTTON.2 D1.2 D3.2 D6.2 D8.2 D9.2 D10.2 D11.2 D12.2 EPD_C1.2 EPD_C2.2 EPD_C5.2 EPD_C6.2 EPD_C7.2 EPD_C8.2 EPD_C9.2 EPD_C10.2 EPD_C11.2 EPD_C12.2 IC1.3 IC4.2 J1.8 J1.17 J1.MP1 J1.MP2 J2.A1 J2.A12 J2.B1 J2.B12 J2.MP1 J2.MP2 J2.MP3 J2.MP4 J3.1 J4.G1 J4.G2 J4.G3 J4.G4 J4.P6 R1_PWRUSB.1 R2-USB1.1 R2-USB.2 R2.1 R2_BAT.1 R4.2 RESET_BUTTON.1 RESET_BUTTON.2 SENSOR2.1 SENSOR2.5 SENSOR2.7 SJ1.1 TP4.TP TP5.TP U1.4 U1.9 U2.1 U2.28 U2.29_1 U2.29_2 U2.29_3 U2.29_4 U2.29_5 U2.29_6 U2.29_7 U2.29_8 U2.29_9 U3.13 U4.1 U4.4 U4.6 U4.9 U5.2
GPIO8: R1.2 U2.10
I2C_PW: C1.1 C2.1 R1-PINH.2 R2-PINH.2 SENSOR2.2 SENSOR2.6 SENSOR2.8 U2.17
INT_RTC: R1-PINH1.1 TP15.TP U2.8 U3.3
IO/BOOT: BOOT_BUTTON.3 BOOT_BUTTON.4 C6.1 R_BOOT.2 U2.15
IO/CHANGE: C10.1 CHANGE_BUTTON.3 CHANGE_BUTTON.4 R_CHANGE.2 U2.23
MISO: D12.1 J4.P7 R8.1 TP6.TP U1.2 U2.27
MOSI: D11.1 J1.14 J4.P3 R7.1 TP7.TP U1.5 U2.7
N$1: C_DELAY.1 IC1.5
N$2: EPD_C6.1 J1.18
N$3: J2.A5 R2-USB1.2
N$4: EPD_C1.1 J1.4
N$5: EPD_C2.1 J1.5
N$6: EPD_C7.1 J1.19
N$7: EPD_C8.1 J1.20
N$8: R1_BAT.1 U5.1
N$9: EPD_C10.1 J1.22
N$10: CHG_LED.C R1_BAT.2
N$11: J2.B5 R2-USB.1
N$12: EPD_C12.1 J1.24
N$13: C4.1 D3.1 D4.2
N$14: R2_BAT.2 U5.5
N$16: C1_BAT1.1 D2.2 IC4.1 IC4.3 Q1.3
N$17: D7.2 R_CAPACITOR.2
PREVGH: D5.2 EPD_C9.1 J1.21
PREVGL: D4.1 EPD_C11.1 J1.23
RESE: J1.3 Q3.2 R3.1
RESE': R2.2 R3.2 SJ1.2
RESET: C5.1 IC1.1 R_RESET.2 RESET_BUTTON.3 RESET_BUTTON.4 U2.3
RTC_RST: U2.16 U3.4
RX: TP2.TP U2.24
SCK: D10.1 J1.13 J4.P5 R6.1 TP8.TP U1.6 U2.6
SCL: J3.4 R2-PINH.1 SENSOR2.4 U2.20 U3.16 U4.7
SDA: J3.3 R1-PINH.1 SENSOR2.3 U2.19 U3.15 U4.8
SRC: C4.2 D5.1 L1.1 Q3.3
SS_SD: D8.1 J4.P2 R10.1 U2.4
TX: TP1.TP U2.25
USB_D+: D1.1 U2.14
USB_D-: D1.3 U2.13
VBAT [Power]: C2_BAT.1 Q1.1 TP3.TP U4.2 U4.3 U5.3
VBUS [Power]: C1_BAT.1 C4_USB.1 C5_USB.1 CHG_LED.A D1.5 D2.1 Q1.2 R1_PWRUSB.2 TP14.TP U5.4
VRTC [Power]: C8.1 C10_SUPERCAP.2 R_CAPACITOR.1 U3.14
VUSB [Power]: J2.A4 J2.A9 J2.B4 J2.B9 PFMF.050.1.1 PFMF.050.1.2

## Tracks (layer width: path | path; a pad name or v marks a point on that pad's centre or on a via)
3V3
  Top 0.3: R_CHANGE.1 60.52,108.52 53.74,108.52 52.42,107.2 R_BOOT.1 52.28,107.13 52.28,106.71 47.64,102.08 47.37,102.08 IC1.2 47.23,102.08 20.43,102.08 | 20.43,96.53 20.43,102.08 | 20.43,102.08 20.43,107.2 R_RESET.1 | 20.43,96.53 20.84,96.12 C9.1 | 20.43,96.53 20.29,96.47 16.27,96.47 10.11,90.3 4.92,90.3 J4.P4 4.78,90.16 4.57,90.16 2.98,88.57 2.98,65.16 2.91,65.03 | 19.6,10.87 22.3,10.87 R9.2 22.44,10.87 25.76,10.87 R5.2 25.9,10.87 29.22,10.87 R6.2 29.36,10.87 32.62,10.87 R8.2 32.83,10.87 36.08,10.87 R7.2 | 19.6,10.87 18.91,10.87 R10.2 | 2.91,65.03 1.73,65.03 TP16.TP | 6.54,61.39 6.92,61.01 6.92,45.84 8.93,43.84 8.93,43.56 U2.2 9,43.42 9,43.07 12.05,40.03 19.18,40.03 R1.1 19.32,39.89 19.6,39.61 19.6,10.87 | 6.54,61.39 2.91,65.03 | J3.2 165.23,18.84 156.99,18.84 141.82,34 C1_BAT2.1 141.69,34.07 138.29,34.07 C3.+ 138.15,34.14 137.6,34.69 134.83,34.69 IC4.5 134.76,34.56 134.76,34.42 132.54,32.2 108.17,32.2 94.32,46.05 94.18,46.12 | 38.71,53.46 38.71,53.25 U1.3 | 38.71,53.46 40.58,55.33 40.58,56.09 40.79,56.3 45.98,56.3 46.47,55.82 U1.8 46.54,55.68 46.54,54.5 U1.7 46.67,54.43 53.67,54.43 75.62,32.48 75.76,32.41 | R_CL1.1 72.85,30.47 74.1,30.47 75.14,29.43 76.17,29.43 76.45,29.71 76.45,31.3 75.69,32.06 Q2.1 75.76,32.2 75.76,32.41 | 88.95,61.25 90.03,60.18 90.03,60.04 90.72,59.35 R1-PINH1.2 90.79,59.21 90.79,50.83 R2-PINH1.2 90.92,50.76 91.34,50.34 93.76,50.34 94.18,49.93 94.18,46.12 | 88.95,61.25 88.16,62.05 87.95,62.05 86.98,63.02 86.15,63.02 D7.1 | 88.95,61.25 87.12,59.42 87.12,58.93 U3.2 | 75.76,32.41 79.15,35.8 83.86,35.8 94.18,46.12 | 6.54,61.39 8.93,63.78 16.07,63.78 17.8,65.51 17.8,65.72 18.49,66.41 25.69,66.41 38.57,53.53 38.71,53.46
32KHZ  (via drill 0.3)
  Top 0.15: 88.57,52.35 88.57,58.66 88.36,58.86 U3.1 | 88.57,52.35 88.57,51.87 90.72,49.72 90.72,49.51 R2-PINH1.1 | v24.93,45.08 19.25,45.08 17.87,43.7 17.87,43.49 U2.9 | v88.5,52.35 88.57,52.35
  Bottom 0.15: v24.93,45.08 48.48,45.08 55.54,52.15 88.29,52.15 v88.5,52.35
DN
  Top 0.15: 162.6,53.88 162.94,53.53 J2.B7 | 162.6,53.88 162.6,54.15 162.94,54.5 164.05,54.5 J2.A7 | 162.6,53.88 161.77,53.88 157.68,49.79 152.56,49.79 D1.4
DP  (via drill 0.3)
  Top 0.15: v163.08,54.02 164.05,54.02 J2.A6 | J2.B6 164.05,54.98 v163.08,54.98 162.46,54.98 159.14,51.66 152.56,51.66 D1.6
  Bottom 0.15: v163.08,54.98 v163.08,54.02
EPD_3V3
  Top 0.3: 80.88,31.16 80.88,32.89 81.09,33.1 L1.2 | 80.88,31.16 80.88,30.05 C7.1 80.95,29.92 80.95,29.78 89.06,21.68 EPD_C5.1 89.12,21.54 83.58,16 82.13,16 81.92,15.79 81.92,15.44 J1.15 81.85,15.3 81.44,15.3 J1.16 81.37,15.17 81.37,14.75 81.16,14.54 77.14,14.54 66.41,3.81 62.46,3.81 TP17.TP | 80.88,31.16 77.77,31.16 Q2.3
EPD_3V3_C
  Top 0.3: Q2.2 75.62,30.19 74.1,31.72 72.85,31.72 R_CL1.2 72.71,31.86 49.17,31.86 20.43,60.59 20.43,60.8 U2.18 20.36,61.01 20.36,63.71 19.04,65.03 TP13.TP
EPD_BUSY  (via drill 0.3)
  Top 0.15: v75.07,11.29 81.3,11.29 84.83,14.82 84.83,15.23 J1.9 | v60.39,11.29 11.7,59.97 10.94,59.97 10.25,60.66 U2.26 10.25,61.01 v10.25,62.12 | v10.32,64.33 11.01,65.03 12.05,65.03 TP9.TP
  Bottom 0.15: v60.39,11.29 v75.07,11.29 | v10.32,64.33 10.32,62.19 v10.25,62.12
EPD_CS
  Top 0.15: R9.1 22.37,12.19 22.37,13.09 25.69,16.41 D6.1 | U2.11 20.43,43.42 20.43,21.74 25.69,16.48 D6.1 | J1.12 83.38,15.23 83.38,14.34 81.3,12.26 76.8,12.26 76.31,11.77 74.93,11.77 65.72,2.56 59.62,2.56 58.45,3.74 TP10.TP 58.38,3.81 46.54,15.65 38.78,15.65 37.26,17.17 32.13,17.17 30.61,15.65 28.25,15.65 27.49,16.41 25.83,16.41 D6.1
EPD_DC  (via drill 0.3)
  Top 0.15: v78.88,11.77 81.23,11.77 83.86,14.4 83.86,15.23 J1.11 | v12.74,42.31 12.74,43.42 U2.5 | v12.4,39.2 8.79,35.59 5.19,35.59 TP11.TP
  Bottom 0.15: v78.88,11.77 78.88,11.91 52.08,38.71 13.23,38.71 12.74,39.2 | v12.74,42.31 12.74,39.2 | 12.74,39.2 v12.4,39.2
EPD_RST  (via drill 0.3)
  Top 0.15: v84.9,16.55 84.42,16.07 84.42,15.3 J1.10 | v70.15,31.3 45.98,31.3 16.62,60.66 16.62,60.94 U2.21 16.55,61.01 v16.55,62.12 | v14.34,64.33 15.03,65.03 15.51,65.03 TP12.TP
  Bottom 0.15: v70.15,31.3 v84.9,16.55 | v16.55,62.12 v14.34,64.33
FLASH_CS  (via drill 0.3)
  Top 0.15: v25.83,13.57 25.83,12.19 R5.1 | D9.1 29.15,16.41 28.88,16.14 v28.39,16.14 28.39,34.76 20.91,42.24 v20.91,42.31 20.91,42.45 21.61,43.14 21.61,43.42 U2.12 | v38.64,55.12 38.64,55.75 U1.1
  Bottom 0.15: v28.39,16.14 v25.83,13.57 | v38.64,55.12 34.83,55.12 26.04,46.33 19.74,46.33 13.02,39.61 13.02,39.33 13.37,38.99 17.59,38.99 v20.91,42.31
GDR
  Top 0.15: J1.2 88.43,15.3 88.43,15.65 91.89,19.11 98.68,19.11 100,20.43 Q3.1 100.07,20.43 102.42,20.43 R4.1
GND  (via drill 0.3)
  Top 0.15: 3.08,94.14 2.29,94.94 2.29,95.29 J4.G4 | 3.08,94.14 4.71,92.52 4.85,92.52 J4.P6 4.71,92.45 1.25,88.99 1.25,82.2 J4.G3 | 50,107.61 47.3,107.61 BOOT_BUTTON.1 47.23,107.55 46.81,107.13 45.7,107.13 C6.2 45.64,107.13 27.77,107.13 27.56,107.34 C5.2 27.49,107.41 25.76,107.41 25.69,107.48 RESET_BUTTON.2 25.62,107.48 22.16,107.48 RESET_BUTTON.1 22.09,107.55 21.81,107.82 16.76,107.82 3.08,94.14 | 50,107.61 50.69,107.61 BOOT_BUTTON.2 | U1.9 42.59,53.81 40.79,52.01 38.71,52.01 U1.4 38.64,51.94 v31.02,51.94 | TP5.TP 5.19,39.75 7.69,42.24 7.69,43.42 U2.1 7.69,43.49 7.69,44.32 v7.41,44.6 | U2.29_1 12.19,49.44 13.37,49.44 U2.29_4 13.43,49.44 14.61,49.44 U2.29_7 14.68,49.51 U2.29_8 14.68,50.76 14.68,51.94 U2.29_9 | U2.29_2 12.19,50.69 13.37,50.69 U2.29_5 | U2.29_3 12.19,51.94 13.37,51.94 U2.29_6 | U2.29_2 12.19,50.76 12.19,51.87 U2.29_3 | U2.28 7.76,60.94 7.76,60.66 12.12,56.3 12.12,52.01 U2.29_3 | U2.29_1 12.19,49.51 12.19,50.62 U2.29_2 | v11.49,48.68 12.19,49.38 U2.29_1 | 16.34,90.92 15.51,90.92 J4.G2 | 16.34,90.92 16.9,90.92 22.02,96.05 22.16,96.05 C9.2 22.23,96.12 42.38,96.12 47.3,101.04 IC1.3 47.37,101.11 47.51,101.11 49.44,103.04 49.44,103.32 49.65,103.53 50,103.53 | 16.34,90.92 16.34,87.05 15.51,86.22 15.51,85.18 J4.G1 15.44,85.11 14.82,84.48 v14.82,83.86 | 50,103.53 50.69,103.53 51.52,102.7 51.52,102.56 C_DELAY.2 51.59,102.7 57.34,102.7 62.19,107.55 CHANGE_BUTTON.1 62.26,107.61 65.72,107.61 CHANGE_BUTTON.2 65.79,107.55 66,107.34 C10.2 67.52,107.27 67.52,82.27 85.59,64.19 85.59,64.13 | v50,105.19 50,107.61 | v50,103.67 50,103.53 | D8.2 22.3,14.89 22.3,13.43 21.61,12.74 21.61,11.77 21.81,11.56 22.85,11.56 25.69,14.4 25.69,14.89 D6.2 25.76,14.96 29.15,14.96 D9.2 29.22,14.96 32.62,14.96 D10.2 32.69,14.96 36.08,14.96 D12.2 36.15,14.96 39.27,14.96 D11.2 39.33,14.89 41,14.89 52.08,3.81 54.36,3.81 TP4.TP 54.43,3.81 v57.06,3.81
  Top 0.15: v78.81,13.99 77.21,13.99 76.45,13.23 76.45,12.81 J1.MP2 | J1.17 80.88,15.3 v80.88,16.07 81.65,16.07 85.8,20.22 86.56,20.22 EPD_C6.2 86.63,20.29 86.63,20.5 87.25,21.12 87.25,22.02 87.12,22.16 84.62,22.16 84.07,21.61 EPD_C7.2 84,21.61 81.58,21.61 EPD_C8.2 81.51,21.61 79.64,21.61 | EPD_C12.2 71.4,21.61 73.89,21.61 EPD_C11.2 73.96,21.61 76.38,21.61 EPD_C10.2 76.38,21.68 76.38,23.13 78.94,25.69 79.64,25.69 | 79.64,21.61 79.01,21.61 EPD_C9.2 | 79.64,21.61 79.64,25.69 | 79.64,25.69 79.64,29.98 C7.2 | 104.88,22.68 105.81,23.61 SJ1.1 105.95,23.68 106.23,23.96 109.35,23.96 R2.1 | 104.88,22.68 103.94,21.74 102.49,21.74 R4.2 | J1.MP1 89.89,12.81 87.46,12.81 85.45,14.82 85.45,15.23 J1.8 85.45,15.3 85.45,16.07 | EPD_C2.2 91.62,21.54 90.37,20.29 89.19,20.29 EPD_C5.2 89.12,20.22 85.45,16.55 85.45,16.07 | EPD_C2.2 91.69,21.61 94.18,21.61 EPD_C1.2 94.25,21.61 97.16,24.52 103.04,24.52 104.88,22.68 | EPD_C2.2 91.69,21.68 91.69,33.38 90.72,34.35 90.72,37.4 D3.2 90.65,37.46 v90.65,41.83 | v85.39,16.07 85.45,16.07 | 140.92,32.76 139.88,32.76 138.22,31.09 C3.- | 140.92,32.76 141.69,32.76 C1_BAT2.2 141.75,32.76 161.63,12.88 | C1.2 162.53,4.71 159.21,4.71 C2.2 159.21,4.78 158.1,5.89 158.1,9.14 | 158.1,9.14 157.47,9.14 156.99,9.63 156.99,9.83 SENSOR2.7 156.92,9.9 156.92,10.18 156.23,10.87 156.23,12.74 SENSOR2.1 | 158.1,9.14 158.58,9.63 158.58,9.83 SENSOR2.5 158.65,9.9 161.63,12.88 | 161.63,12.88 165.23,16.48 165.23,17.8 J3.1 | J2.B12 164.05,51.18 164.05,50.97 J2.A1 164.12,50.9 164.12,49.72 164.61,49.24 J2.MP3 164.68,49.24 166.62,49.24 | 166.62,49.24 168.55,49.24 J2.MP1
  Top 0.15: J2.B1 164.05,57.41 164.05,57.62 J2.A12 164.12,57.69 164.12,58.86 164.61,59.35 J2.MP4 | 166.62,59.42 164.68,59.42 J2.MP4 | 166.62,59.42 168.55,59.42 J2.MP2 | 166.62,59.42 166.62,49.24 | U4.9 155.81,61.91 155.12,61.22 154.77,61.22 U4.4 154.7,61.15 154.7,54.02 154.43,53.74 R2-USB.2 154.36,53.67 153.25,53.67 150.34,50.76 150.06,50.76 D1.2 150,50.69 147.36,50.69 147.02,50.34 R2-USB1.1 146.95,50.28 145.77,50.28 145.56,50.07 138.22,50.07 C2_BAT.2 138.43,50 v138.43,49.24 | U4.1 154.77,62.6 155.19,62.6 155.81,61.98 U4.9 | U4.9 155.88,61.91 156.09,61.7 156.71,61.7 U4.6 156.78,61.63 157.13,61.63 159.9,58.86 164.05,58.86 J2.MP4 | 85.59,64.13 88.71,64.13 93.07,59.76 93.07,51.38 C10_SUPERCAP.1 93.14,51.31 122.09,51.31 125.62,47.78 C1_BAT.2 125.69,47.71 125.69,40.16 128.04,37.81 R1_PWRUSB.1 | 85.59,64.13 85.04,63.57 85.04,50.14 84.55,49.65 U3.13 84.55,49.58 84.55,49.24 86.15,47.64 86.15,46.95 C8.2 86.22,46.88 86.36,46.74 v86.36,46.12 | C1_BAT1.2 127.56,33.45 127.56,33.66 126.94,34.28 126.94,36.56 128.04,37.67 R1_PWRUSB.1 | 131.82,42.07 129.71,44.18 129.71,45.15 129.15,45.7 129.15,45.91 R2_BAT.1 | 131.82,42.07 132.68,41.2 132.68,34.35 132.13,33.79 131.99,33.79 IC4.2 | C4_USB.2 152.63,46.81 152.63,48.06 C5_USB.2 152.56,48.13 151.94,48.75 v151.94,48.82 | v136.01,46.81 135.04,46.81 U5.2 | v131.92,42.1 131.85,42.1 131.82,42.07 | v128.74,38.99 127.83,38.09 R1_PWRUSB.1 | v140.92,33.52 140.92,32.76
  Bottom 0.15: v7.41,44.6 v11.49,48.68 11.56,48.68 14.82,51.94 | 14.82,51.94 v31.02,51.94 | 14.82,51.94 14.82,54.22 9.7,59.35 9.7,78.74 v14.82,83.86 | v50,103.67 v50,105.19 | v85.39,16.07 v80.88,16.07 v78.81,13.99 78.81,13.92 79.36,13.37 79.36,11.63 78.53,10.8 74.31,10.8 67.31,3.81 v57.06,3.81 | 140.92,48.82 138.92,48.82 138.5,49.24 v138.43,49.24 v136.01,46.81 136.01,46.19 v131.92,42.1 131.85,42.1 v128.74,38.99 | 140.92,48.82 v151.94,48.82 | 140.92,48.82 v140.92,33.52 | v86.36,46.12 v90.65,41.83
  pour Top: -36.12,-49.72 207.02,-49.72 207.02,144.12 -36.13,144.12 -36.12,144.12
  pour Bottom: -37.02,-53.72 207.42,-53.72 207.42,145.92 -37.02,145.92
GPIO8
  Top 0.15: R1.2 19.18,41.34 19.18,43.42 U2.10
I2C_PW  (via drill 0.3)
  Top 0.15: SENSOR2.6 157.75,9.9 157.75,10.11 156.99,10.87 156.99,12.74 SENSOR2.2 156.92,12.81 156.92,13.09 156.5,13.5 155.88,13.5 155.67,13.3 155.67,10.39 156.16,9.9 SENSOR2.8 156.23,9.83 156.23,6.58 156.44,6.37 156.44,5.54 | C2.1 159.21,6.03 162.53,6.03 C1.1 162.6,5.96 162.6,5.75 163.22,5.12 163.22,4.22 163.08,4.09 157.96,4.09 156.5,5.54 156.44,5.54 | 156.44,5.54 155.67,4.78 R1-PINH.2 155.67,4.71 152.35,4.71 R2-PINH.2 152.28,4.71 152,4.99 v151.45,4.99 | v67.8,39.54 42.8,39.54 21.68,60.66 U2.17
  Bottom 0.15: v67.8,39.54 116.89,39.54 v151.45,4.99
INT_RTC  (via drill 0.3)
  Top 0.15: R1-PINH1.1 90.79,60.59 90.79,61.63 88.57,63.85 85.73,63.85 85.45,63.57 85.45,59.28 85.8,58.93 U3.3 85.8,58.86 85.8,53.74 v85.52,53.46 | v14.61,40.58 16.55,42.52 16.55,43.42 U2.8 | v13.5,39.47 13.3,39.47 5.19,31.37 TP15.TP
  Bottom 0.15: v13.5,39.47 v14.61,40.58 14.68,40.58 20.15,46.05 38.78,46.05 46.19,53.46 v85.52,53.46
IO/BOOT  (via drill 0.3)
  Top 0.15: R_BOOT.2 52.28,108.44 51.38,108.44 50.76,109.07 BOOT_BUTTON.3 50.69,109.14 47.3,109.14 BOOT_BUTTON.4 47.23,109.07 46.54,108.38 45.7,108.38 C6.1 45.64,108.38 v44.94,107.68 | v24.24,65.86 24.24,61.01 U2.15
  Bottom 0.15: v24.24,65.86 24.24,86.98 v44.94,107.68
IO/CHANGE  (via drill 0.3)
  Top 0.15: C10.1 67.45,108.65 66.2,108.65 65.79,109.07 CHANGE_BUTTON.3 65.72,109.07 62.26,109.07 CHANGE_BUTTON.4 62.19,109.07 60.59,107.48 60.59,107.34 R_CHANGE.2 60.52,107.2 v59.9,106.58 | v16.07,63.23 14.06,61.22 14.06,61.01 U2.23
  Bottom 0.15: v16.07,63.23 22.23,63.23 59.9,100.9 v59.9,106.58
MISO  (via drill 0.3)
  Top 0.15: 36.91,12.74 41.48,12.74 50.41,3.81 TP6.TP | 36.91,12.74 35.59,12.74 35.04,12.19 32.69,12.19 R8.1 | v36.91,15.65 D12.1 | v36.91,12.81 36.91,12.74 | v33.66,59.49 38.64,54.5 U1.2 | v10.18,59.49 9,60.66 9,60.94 U2.27 8.93,61.01 v8.93,62.12 | v7.96,90.86 5.26,93.56 5.12,93.56 J4.P7
  Bottom 0.15: v36.91,12.81 v36.91,15.65 35.32,15.65 11.91,39.06 11.91,41 12.05,41.13 12.05,42.1 9.07,45.08 8.52,45.08 7.55,44.11 7.27,44.11 6.92,44.46 6.92,45.08 11.01,49.17 11.01,56.16 8.93,58.24 v8.93,62.12 9,62.19 9,62.74 7.96,63.78 v7.96,90.86 | v10.18,59.49 v33.66,59.49
MOSI  (via drill 0.3)
  Top 0.15: v77.01,13.16 80.68,13.16 82.34,14.82 82.34,15.23 J1.14 | v47.44,4.78 46.47,3.81 TP7.TP 46.4,3.81 38.09,12.12 36.15,12.12 R7.1 | v40.16,16.14 39.89,16.41 39.33,16.41 D11.1 39.27,16.48 39.27,31.16 25.41,45.01 25.41,45.22 25.07,45.57 v20.29,45.57 17.17,45.57 15.37,43.77 15.37,43.49 U2.7 | v38.43,45.57 43.8,50.93 | 43.8,50.93 44.8,51.94 46.47,51.94 U1.5 | v39.96,55.47 6.3,89.12 5.12,89.12 J4.P3 | 43.8,50.93 v43.42,51.31
  Bottom 0.15: v77.01,13.16 55.82,13.16 49.48,6.82 | v47.44,4.78 49.48,6.82 | 49.48,6.82 v40.16,16.14 | v20.29,45.57 v38.43,45.57 | v39.96,55.47 39.96,54.78 v43.42,51.31
N$1
  Top 0.15: IC1.5 50.21,102.91 50.21,102.56 51.52,101.24 C_DELAY.1
N$2
  Top 0.15: J1.18 80.4,15.3 80.4,16.2 83.86,19.67 84.69,19.67 86.56,21.54 EPD_C6.1
N$3  (via drill 0.3)
  Top 0.15: v147.71,52.35 147.02,51.66 R2-USB1.2 | v162.18,52.35 162.81,52.35 163.43,52.98 164.05,52.98 J2.A5
  Bottom 0.15: v162.18,52.35 v147.71,52.35
N$4
  Top 0.15: J1.4 87.46,15.3 87.46,15.72 91.41,19.67 93.63,19.67 94.18,20.22 EPD_C1.1
N$5
  Top 0.15: J1.5 86.91,15.3 86.91,15.65 91.48,20.22 91.62,20.22 EPD_C2.1
N$6
  Top 0.15: J1.19 79.92,15.3 79.92,16.14 84,20.22 EPD_C7.1
N$7
  Top 0.15: J1.20 79.43,15.3 79.43,18.14 81.51,20.22 EPD_C8.1
N$8  (via drill 0.3)
  Top 0.15: v133.93,44.74 132.13,42.94 R1_BAT.1 | v134.07,46.26 134.55,46.26 134.97,45.84 U5.1
  Bottom 0.15: v133.93,44.74 133.93,46.12 v134.07,46.26
N$9
  Top 0.15: J1.22 78.39,15.3 78.39,18.28 76.45,20.22 EPD_C10.1
N$10
  Top 0.15: CHG_LED.C 129.22,47.71 129.22,46.95 129.77,46.4 129.77,45.5 131.09,44.18 132.06,44.18 R1_BAT.2
N$11
  Top 0.15: R2-USB.1 154.43,52.42 159.48,52.42 163.08,56.02 164.05,56.02 J2.B5
N$12
  Top 0.15: J1.24 77.35,15.3 76.31,15.3 71.4,20.22 EPD_C12.1
N$13
  Top 0.15: 94.73,36.91 97.64,36.91 C4.1 | 94.73,36.91 94.25,37.4 D3.1 | D4.2 94.32,33.03 94.32,36.42 94.73,36.84 94.73,36.91
N$14
  Top 0.15: R2_BAT.2 130.4,45.91 132.34,45.91 132.41,45.84 U5.5
N$16  (via drill 0.3)
  Top 0.15: 131.3,34.14 131.3,33.38 131.44,33.24 131.51,33.24 131.92,32.83 IC4.3 | 131.3,34.14 131.92,34.76 IC4.1 | v128.39,35.52 127.63,34.76 C1_BAT1.1 | v129.5,35.8 129.5,35.18 129.64,35.04 D2.2 129.71,34.97 130.54,34.14 131.3,34.14 | v140.44,47.23 141.62,48.41 Q1.3
  Bottom 0.15: v128.39,35.52 129.22,35.52 v129.5,35.8 129.5,35.87 140.44,46.81 v140.44,47.23
N$17  (via drill 0.3)
  Top 0.15: v86.49,62.19 86.49,61.29 R_CAPACITOR.2 | v87.39,63.36 87.88,63.36 88.16,63.09 D7.2
  Bottom 0.15: v86.49,62.19 86.49,62.46 v87.39,63.36
PREVGH  (via drill 0.3)
  Top 0.15: J1.21 78.94,15.3 78.94,20.22 EPD_C9.1 78.94,20.29 78.32,20.91 78.32,22.02 79.08,22.78 v79.08,25.21 | v79.08,38.57 79.08,42.24 D5.2
  Bottom 0.15: v79.08,25.21 v79.08,38.57
PREVGL  (via drill 0.3)
  Top 0.15: 74.62,19.56 73.96,20.22 EPD_C11.1 | 74.62,19.56 77.84,16.34 77.84,15.3 J1.23 | v87.46,32.96 90.72,32.96 D4.1 | v78.6,24.1 78.6,22.71 77.14,21.26 77.14,21.12 76.87,20.84 75.9,20.84 74.62,19.56
  Bottom 0.15: v78.6,24.1 v87.46,32.96
RESE
  Top 0.15: J1.3 87.95,15.3 87.95,15.72 91.62,19.39 95.08,19.39 97.36,21.68 100,21.68 Q3.2 100.07,21.74 102.21,23.89 102.42,23.89 R3.1
RESE'
  Top 0.15: R3.2 102.49,25.21 105.81,25.21 SJ1.2 105.81,25.28 109.35,25.28 R2.2
RESET  (via drill 0.3)
  Top 0.15: R_RESET.2 20.43,108.58 21.74,108.58 22.09,108.93 RESET_BUTTON.4 25.62,109 RESET_BUTTON.3 25.69,108.93 25.9,108.72 27.49,108.72 C5.1 27.56,108.65 v28.39,107.82 | v33.24,102.97 47.3,102.97 IC1.1 | v9.42,58.38 9.42,49.79 10.18,49.03 10.18,43.49 U2.3
  Bottom 0.15: v28.39,107.82 v33.24,102.97 33.24,102.91 9.42,79.08 v9.42,58.38
RTC_RST  (via drill 0.3)
  Top 0.15: v31.37,59.97 23.68,59.97 22.99,60.66 22.99,60.94 U2.16 | v83.86,60.11 83.86,59.55 84.48,58.93 U3.4
  Bottom 0.15: v31.37,59.97 83.72,59.97 v83.86,60.11
RX  (via drill 0.3)
  Top 0.15: v12.74,62.53 12.74,61.01 U2.24 | v10.25,65.03 8.66,65.03 TP2.TP
  Bottom 0.15: v10.25,65.03 v12.74,62.53
SCK  (via drill 0.3)
  Top 0.15: v82.89,14.47 82.89,15.23 J1.13 | v53.46,48.61 51.11,48.61 46.54,53.18 U1.6 | 31.58,12.12 29.29,12.12 R6.1 | 31.58,12.12 32.27,11.43 36.7,11.43 42.38,5.75 42.38,3.81 TP8.TP | v31.65,15.44 32.62,16.41 D10.1 | v31.65,12.26 31.58,12.19 31.58,12.12 | v6.23,90.86 5.75,91.34 5.12,91.34 J4.P5 | v10.53,49.31 10.53,47.23 13.99,43.77 13.99,43.49 U2.6 14.06,43.77 16.34,46.05 25,46.05 v27.7,43.35
  Bottom 0.15: v82.89,14.47 84.42,14.47 85.87,15.93 85.87,16.2 v53.46,48.61 53.25,48.61 47.99,43.35 v27.7,43.35 | v31.65,12.26 v31.65,15.44 29.71,15.44 11.98,33.17 11.43,33.17 6.65,37.95 6.65,46.19 9.7,49.24 9.7,49.31 | v6.23,90.86 6.23,61.63 6.92,60.94 6.92,52.08 9.7,49.31 | v10.53,49.31 9.7,49.31
SCL  (via drill 0.3)
  Top 0.15: 157.54,14.06 155.6,14.06 152.35,10.8 152.35,6.03 R2-PINH.1 | 157.54,14.06 158.51,13.09 158.51,12.81 SENSOR2.4 | v160.04,59.35 157.27,62.12 156.78,62.12 U4.7 | v164.61,21.47 165.23,20.84 J3.4 | v157.54,14.34 157.54,14.06 | v22.09,56.44 17.87,60.66 U2.20 | v86.98,53.25 88.29,51.94 88.29,49.65 U3.16
  Bottom 0.15: v157.54,14.34 164.61,21.4 v164.61,21.47 164.61,50.55 160.04,55.12 v160.04,59.35 159.76,59.35 155.67,63.43 97.23,63.43 87.05,53.25 v86.98,53.25 83.79,56.44 v22.09,56.44
SDA  (via drill 0.3)
  Top 0.15: SENSOR2.3 157.75,12.81 157.75,13.02 156.99,13.78 155.74,13.78 155.4,13.43 155.4,10.25 155.67,9.97 155.67,6.03 R1-PINH.1 155.6,6.03 153.46,6.03 152.84,5.4 151.66,5.4 151.59,5.47 151.31,5.47 150.97,5.12 150.97,4.85 152,3.81 163.22,3.81 166.13,6.72 166.13,19.18 165.58,19.74 J3.3 165.3,19.8 165.58,19.8 166.13,20.36 166.13,21.26 169.8,24.93 169.8,60.59 167.79,62.6 156.78,62.6 U4.8 156.71,62.74 156.37,62.74 156.16,62.95 v155.54,62.95 | v23.89,55.95 19.18,60.66 19.18,60.94 U2.19 | v86.98,52.63 86.98,49.72 87.05,49.65 U3.15
  Bottom 0.15: v23.89,55.95 83.65,55.95 v86.98,52.63 87.05,52.63 97.36,62.95 v155.54,62.95
SRC  (via drill 0.3)
  Top 0.15: 82.48,39.06 82.48,42.24 D5.1 | 82.48,39.06 81.16,37.74 L1.1 | Q3.3 97.92,21.12 107.61,21.12 110.04,23.55 110.04,25.83 97.71,38.16 C4.2 97.64,38.23 v96.81,39.06 | v86.36,39.06 82.48,39.06
  Bottom 0.15: v96.81,39.06 v86.36,39.06
SS_SD  (via drill 0.3)
  Top 0.15: v21.54,15.65 D8.1 | R10.1 18.91,12.19 v18.91,13.02 18.91,13.09 11.56,20.43 v11.56,33.66 | v11.56,41.27 11.56,43.42 U2.4 | v7.2,86.36 5.54,88.02 J4.P2 | v8.93,44.6 v8.93,50.69
  Bottom 0.15: v21.54,15.65 v18.91,13.02 | v11.56,33.66 v11.56,41.27 11.56,41.34 8.93,43.97 v8.93,44.6 | v7.2,86.36 7.2,52.42 v8.93,50.69
TX  (via drill 0.3)
  Top 0.15: v8.52,62.6 10.39,62.6 11.49,61.49 11.49,61.01 U2.25 | v7.69,63.43 6.79,63.43 5.19,65.03 TP1.TP
  Bottom 0.15: v7.69,63.43 v8.52,62.6
USB_D+  (via drill 0.3)
  Top 0.15: v147.85,51.59 150,51.59 D1.1 | v25.07,44.32 24.24,43.49 U2.14
  Bottom 0.15: v147.85,51.59 55.4,51.59 48.13,44.32 v25.07,44.32
USB_D-  (via drill 0.3)
  Top 0.15: v145.84,49.72 150,49.72 D1.3 | v23.82,44.6 22.99,43.77 22.99,43.49 U2.13
  Bottom 0.15: v145.84,49.72 53.95,49.72 48.06,43.84 24.58,43.84 v23.82,44.6
VBAT
  Top 0.3: 136.87,50.03 135.04,48.2 135.04,47.71 U5.3 | 136.87,50.03 138.15,51.31 C2_BAT.1 138.22,51.45 138.22,59.76 140.51,62.05 140.58,62.19 | 136.87,50.03 140.51,46.4 140.65,46.4 Q1.1 | U4.3 154.77,61.7 154.77,62.12 U4.2 154.63,62.19 140.58,62.19 | 140.58,62.19 138.15,64.61 TP3.TP
VBUS
  Top 0.3: D1.5 152.49,50.69 152.14,50.69 151.38,49.93 151.38,48.2 C5_USB.1 151.31,48.06 151.31,46.88 C4_USB.1 151.24,46.74 150.9,46.4 142.66,46.4 Q1.2 142.52,46.26 141.89,46.26 140.85,45.22 134.28,45.22 132.47,47.02 132.47,47.58 U5.4 | D2.1 129.64,32.96 129.64,33.79 128.94,34.49 128.94,37.26 129.36,37.67 R1_PWRUSB.2 129.29,37.88 129.29,44.53 128.11,45.7 128.11,47.64 128.04,47.78 | U5.4 130.74,47.71 CHG_LED.A 130.61,47.85 129.98,48.48 128.74,48.48 128.04,47.78 | 128.04,47.78 127,47.78 C1_BAT.1 | TP14.TP 134.21,64.61 134.21,49.58 132.47,47.85 U5.4
VRTC
  Top 0.3: 87.46,47.51 87.46,46.95 C8.1 | 87.46,47.51 85.87,49.1 85.87,49.58 U3.14 85.94,49.72 86.42,50.21 86.42,59.97 86.7,60.25 86.77,60.25 87.74,61.22 R_CAPACITOR.1 | C10_SUPERCAP.2 93.07,49.1 91.62,49.1 90.09,47.58 87.6,47.58 87.46,47.51
VUSB
  Top 0.3: J2.A9 164.05,56.78 164.05,56.58 J2.B4 164.19,56.51 164.75,56.51 164.95,56.3 164.95,52.28 164.75,52.08 164.19,52.08 J2.B9 164.05,52.01 164.05,51.8 J2.A4 163.91,51.73 160.18,51.73 152.7,44.25 PFMF.050.1.2 152.56,44.25 148.19,44.25 PFMF.050.1.1